# Altium PCB PCB1.PcbDoc
Units mil, origin at the board's own origin, x right, y up, seen from the top; angles counter-clockwise.
Board outline 2550 x 2235 mil, 2 copper layers (Top Layer, Bottom Layer); 39 components, 28 nets, 166 pads, 16 vias.
Unrouted connection lines stored in the file: 1.
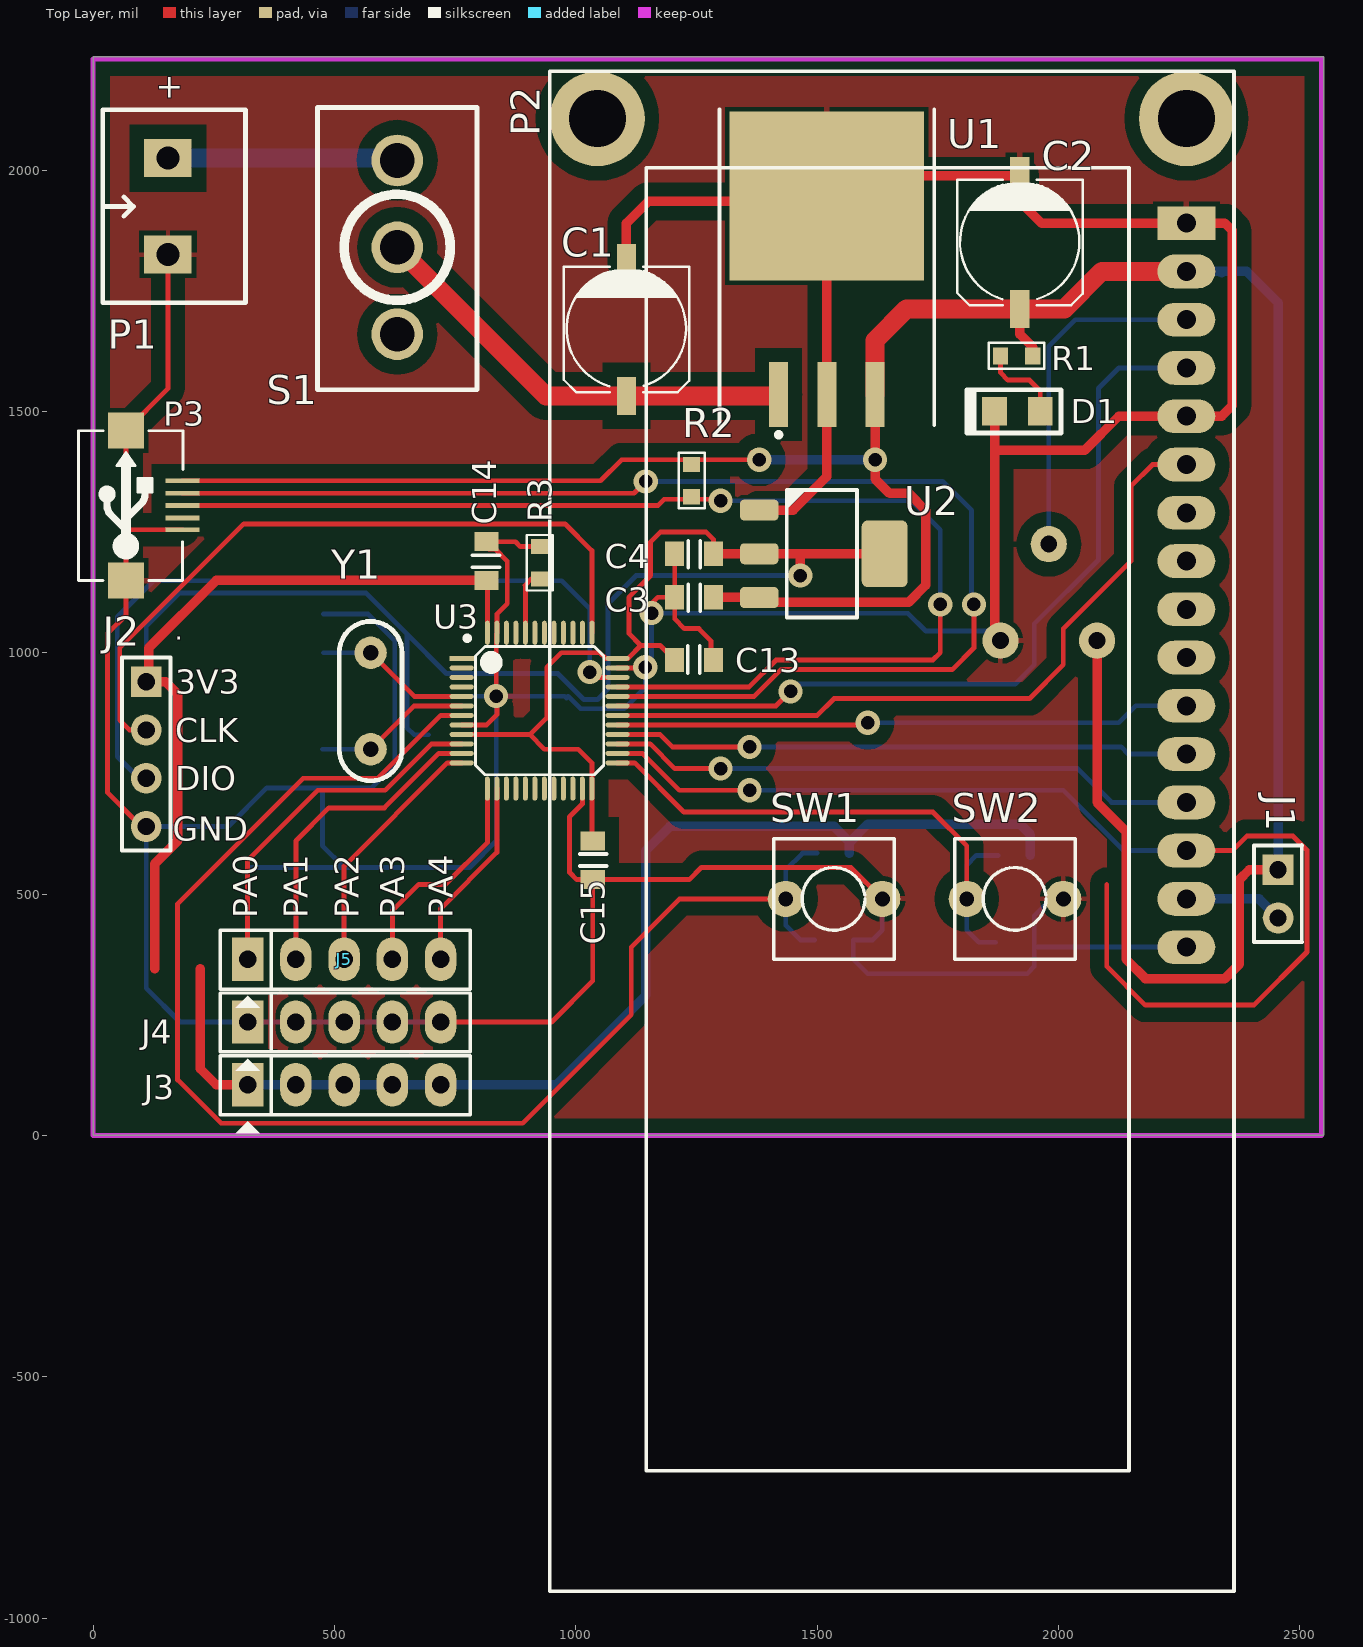
[diagram p0: Top Layer view]
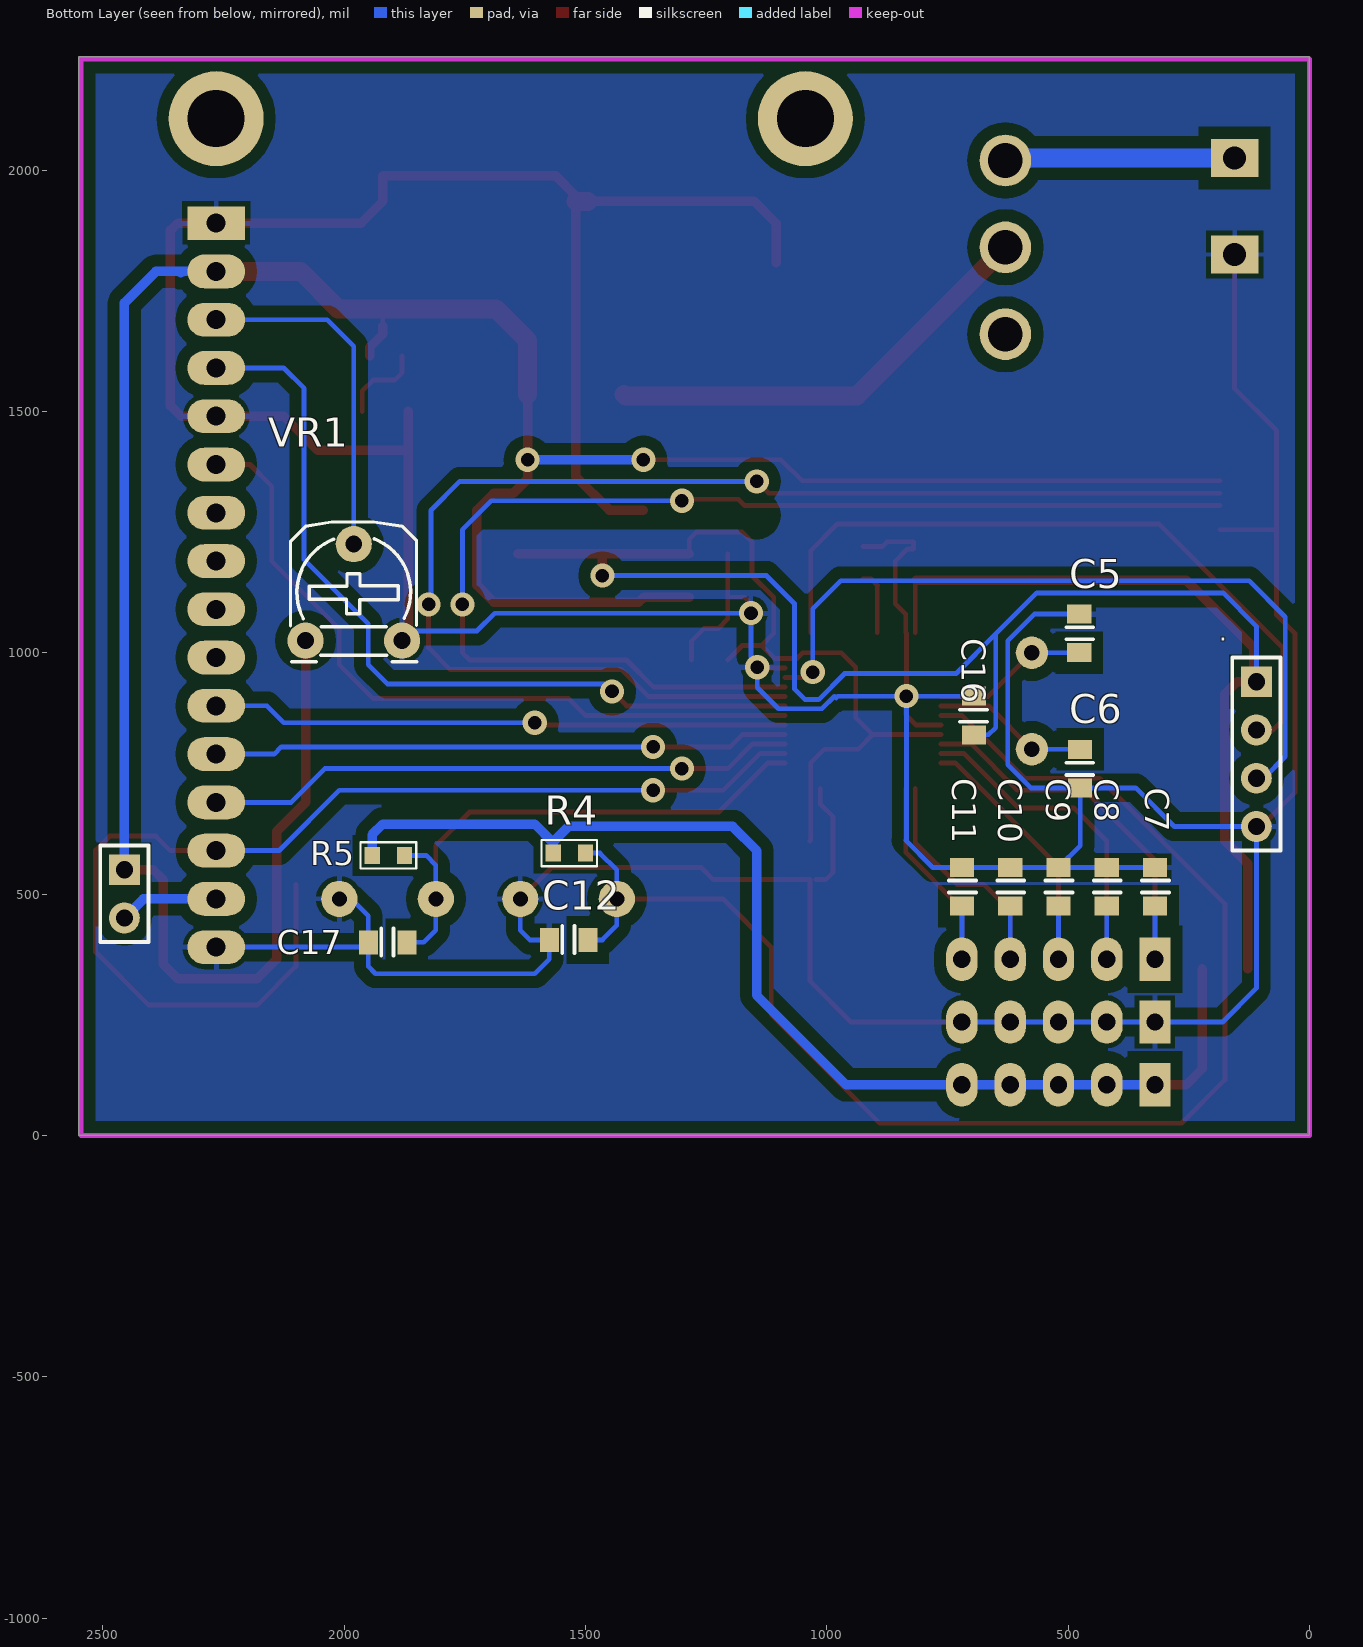
[diagram p1: Bottom Layer view, seen from below]
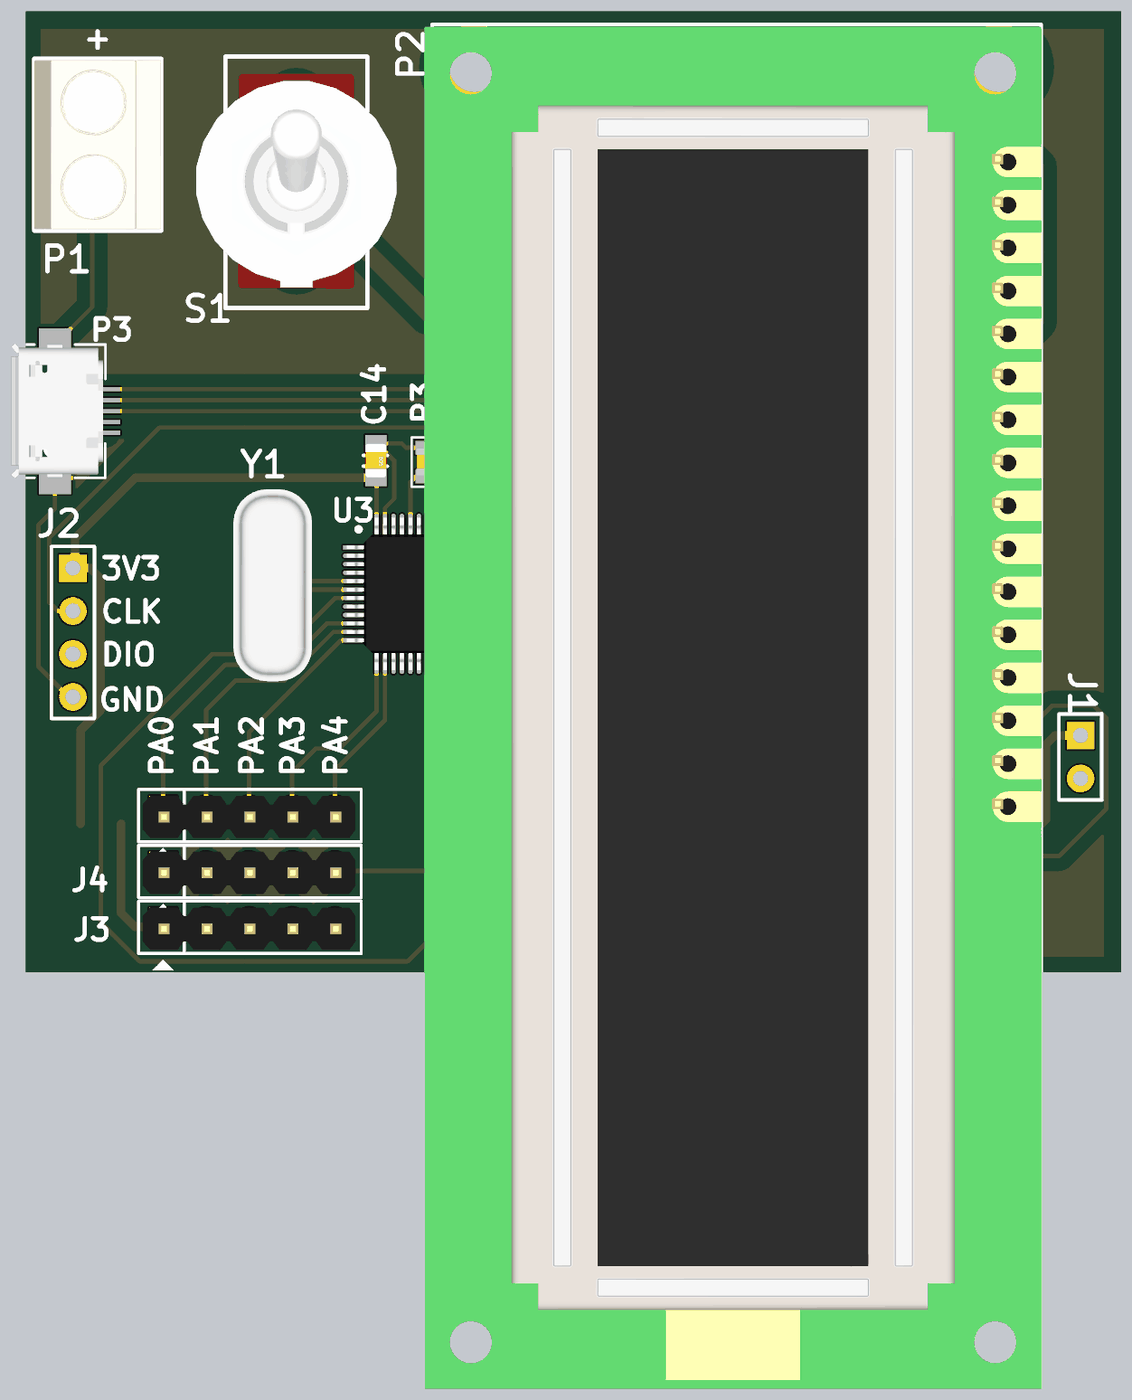
[diagram p2: 3D render of the assembled board from above, using the file's embedded part models]
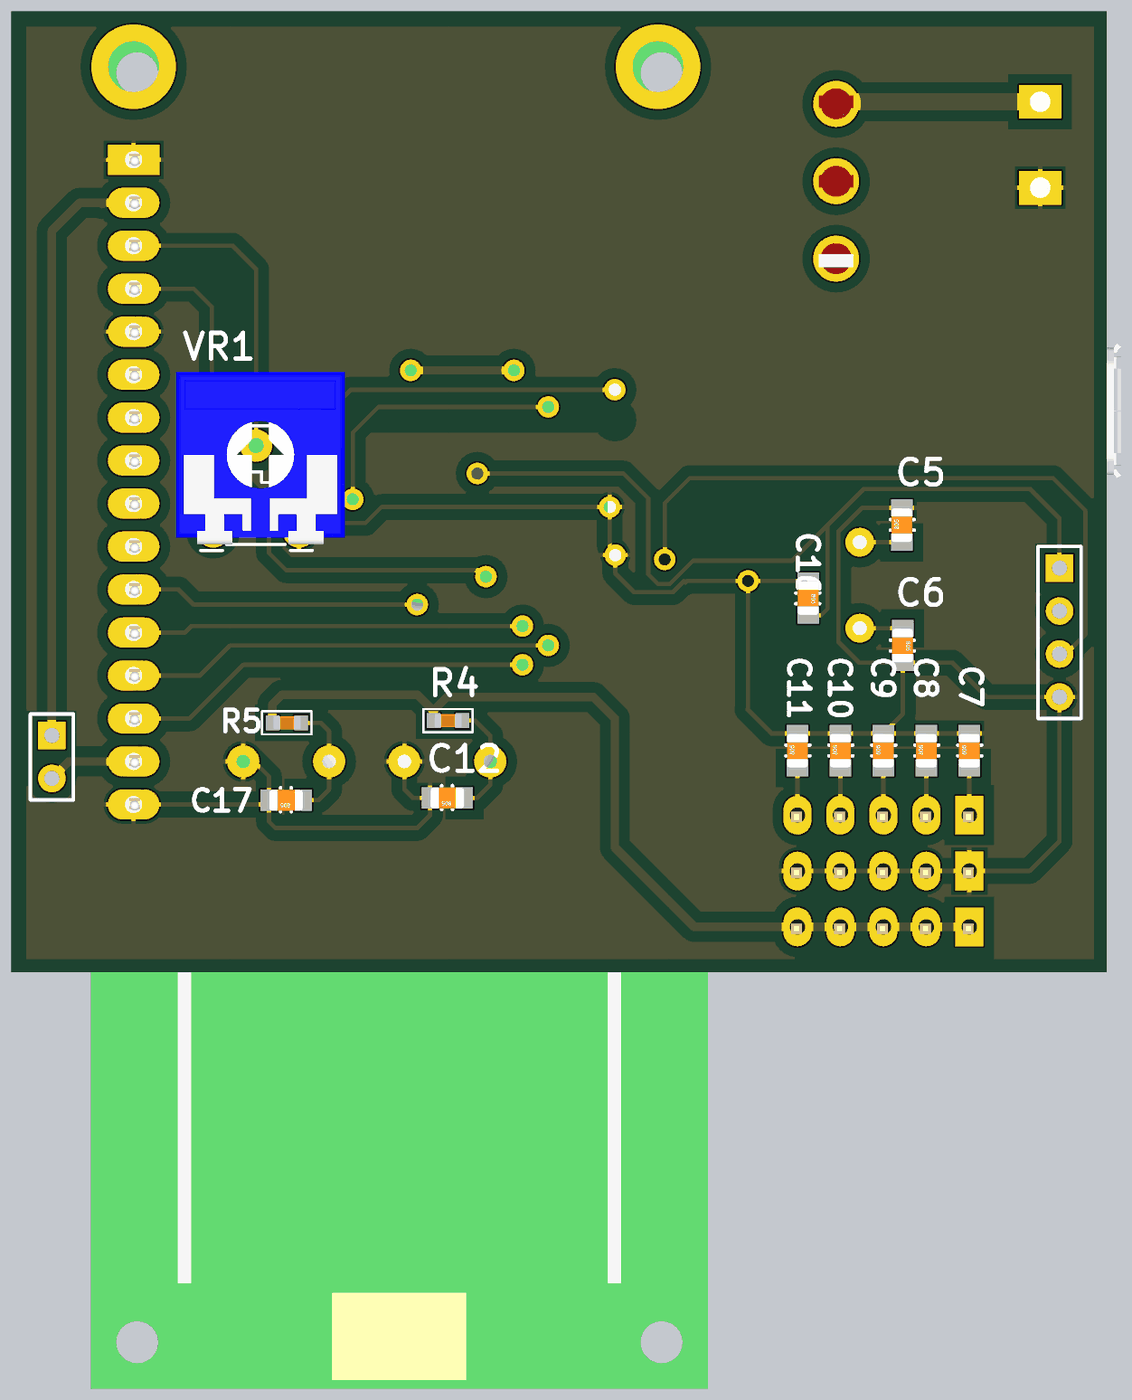
[diagram p3: 3D render of the assembled board from below, using the file's embedded part models]

## Layer stack, top to bottom
Top Solder: solder mask 0.4, Solder Resist, Dk 3.5
Top Layer: signal copper 1.4
Dielectric 1: dielectric 12.6, FR-4, Dk 4.8
Bottom Layer: signal copper 1.4
Bottom Solder: solder mask 0.4, Solder Resist, Dk 3.5

## Board outline
0,0 2550,0 2550,2235 0,2235

## Design rules (kind name [scope] priority, off if disabled: settings)
Clearance [All] p1: gap=2 ignorepadtopadclearanceinfootprint=FALSE
PolygonConnect [All] p1: connectstyle=Relief reliefconductorwidth=10 reliefentries=4 polygonreliefangle="90 Angle" airgapwidth=10
RoutingVias [All] p1: holewidth=28 width=50 viastyle="Through Hole" minholewidth=28 minwidth=50 maxholewidth=28 maxwidth=50
SolderMaskExpansion [All] p1: expansion=4
Width [All] p1: maxlimit=39.37 minlimit=10 preferedwidth=19.68
30 further rules are at their usual default settings.

## Components (designator, comment, footprint, x,y, rotation, side; value= is the part's Value field where it differs from the comment)
C1 "100uF" CAP_SMD_6_3MM 1105,1670 r90 top
C2 "100uF" CAP_SMD_6_3MM 1920,1850 r90 top
C3 "Cap Non-pol" CAP_SMD_0805 1245,1115 r0 top value=104
C4 "Cap Non-pol" CAP_SMD_0805 1245,1205 r0 top value=104
C5 "Cap Non-pol" CAP_SMD_0805 477,1040 r90 bottom value=22pF
C6 "Cap Non-pol" CAP_SMD_0805 475,760 r270 bottom value=22pF
C7 "Cap Non-pol" CAP_SMD_0805 320,515 r90 bottom value=104
C8 "Cap Non-pol" CAP_SMD_0805 420,515 r90 bottom value=104
C9 "Cap Non-pol" CAP_SMD_0805 520,515 r90 bottom value=104
C10 "Cap Non-pol" CAP_SMD_0805 620,515 r90 bottom value=104
C11 "Cap Non-pol" CAP_SMD_0805 720,515 r90 bottom value=104
C12 "Cap Non-pol" CAP_SMD_0805 1535,405 r0 bottom value=104
C13 "Cap Non-pol" CAP_SMD_0805 1245,985 r180 top value=104
C14 "Cap Non-pol" CAP_SMD_0805 815,1190 r270 top value=104
C15 "Cap Non-pol" CAP_SMD_0805 1035,570 r90 top value=104
C16 "Cap Non-pol" CAP_SMD_0805 695,870 r270 bottom value=104
C17 "Cap Non-pol" CAP_SMD_0805 1910,400 r0 bottom value=104
D1 "LED" "LED-0805 GREEN" 1915,1500 r180 top
J1 "Jumper LCD A" CON.HDR1X2 2455,550 r270 top value=J3
J2 "Serial Wire" CON.HDR1X4 110,940 r270 top
J3 "JP5" JP5 320,105 r0 top
J4 "JP5" JP5 320,235 r0 top
J5 "JP5" JP5 320,365 r0 top
P1 "Pin" "Medium - Header 2" 155,1925 r90 top
P2 "LCD16x2" LCD16x2 2261,1891 r270 top
P3 "Micro USB" USB-MICRO 185,1305 r90 top
R1 "RESISTOR" RES_SMD_0603 1920,1615 r0 top value=1K
R2 "RESISTOR" RES_SMD_0603 1240,1350 r270 top value=1K5
R3 "RESISTOR" RES_SMD_0603 925,1180 r270 top value=10K
R4 "RESISTOR" RES_SMD_0603 1540,585 r0 bottom value=10K
R5 "RESISTOR" RES_SMD_0603 1915,580 r0 bottom value=10K
S1 "Switch SPDT" SPDT 630,2020 r270 top
SW1 "SW" SW2 1435,490 r0 top value="SW chip 2 pin"
SW2 "SW" SW2 1810,490 r0 top value="SW chip 2 pin"
U1 "LM78xx" TO-263 1420.22,1534.66 r0 top value=LM7805CT
U2 "AMS1117-3.3" SOT223 1511,1205 r270 top
U3 "STM32F103C8T6" TQFP48L 925,880 r0 top
VR1 "100K" VR 2080,1025 r180 bottom value="VR 10K"
Y1 "8MHz" XTAL 575,900 r180 top

## Footprints (in the part's own frame and the unit in brackets; to place one, negate y for a bottom-side part, rotate by r counter-clockwise, add the part's x,y. Pads: shape width x height; smd on the part's side, far side on the other; paste and mask are expansions set on the pad)
CAP_SMD_6_3MM [mm] "47uF 25V"
  rect 2x1.016 smd: 1(-3.5,0) 2(3.5,0)
  silkscreen extent -3.3,-3.3 3.3,3.3, body extent -3.79,-3.25 3.75,3.25, height 5.52
CAP_SMD_0805 [mil] "Chip Resistor; Body 2.0 x 1.3 mm (LxW typ)"
  rect 39.37x50 smd: 1(-40,0) 2(40,0)
  silkscreen extent -12,-29 13,27, body extent -39,-25 39,25, height 31
CON.HDR1X2 [mil]
  rect 64x64 hole 35.43: 1(-0.44,0.28)
  round 64 hole 35.43: 2(99.56,0.28)
  silkscreen extent -51,-50 150,50, body extent -51,-50 149,50, height 350
CON.HDR1X4 [mil]
  rect 64x64 hole 35.43: 1(0,0)
  round 64 hole 35.43: 2(100,0) 3(200,0) 4(300,0)
  silkscreen extent -50,-50 350,50, body extent -50,-50 350,50, height 350
JP5 [mil] "JP5"
  rect 65x90 hole 36: 1(0,0)
  oval 65x90 hole 36: 2(100,0) 3(200,0) 4(300,0) 5(400,0)
  silkscreen extent -57,-101 461,60, body extent -48,-53 448,45, height 323
LCD16x2 [mil] "Character LCD 16x2"
  round 196.85 hole 118.11: 0(-215.54,4) 0(-215.54,-1216.47)
  round 0 all layers, no hole: 0(2737.22,-1216.47) 0(2737.22,4) ""(-215.54,4)
  rect 70x120 hole 39.37: 1(1,4)
  oval 70x120 hole 39.37: 2(101,4.02) 3(201,4) 4(301,4) 5(401,4) 6(501,4) 7(601,4) 8(701,4) 9(801,4) 10(901,4) 11(1001,4) 12(1101,4) 13(1201,4) 14(1301,4) 15(1401,4) 16(1501,4)
  silkscreen extent -314,-1315 2836,102, body extent -309,-1333 2861,104, height 788
"LED-0805 GREEN" [mm] "Chip LED; GREEN; Body 2.0 x 1.3 mm (LxW typ) [2012]"
  rect 1.3x1.5 smd: 1(-1.204,0) 2(1.204,0)
  silkscreen extent -2.29,-1.14 2.67,1.14, body extent -1.01,-0.63 1.01,0.62, height 1.1
"Medium - Header 2" [mm]
  rect 2x2.5 hole 1.2: 1(-2.54,0) 2(2.54,0)
  silkscreen extent -5.08,-4.08 5.08,3.43, body extent -5,-4.07 5,3.43, height 10
RES_SMD_0603 [mm] "Chip Resistor; Body 2.0 x 1.3 mm (LxW typ)"
  rect 0.8x0.9 smd: 1(-1.016,0) 2(0.684,0)
  silkscreen extent -1.63,-0.69 1.3,0.69, body extent -0.98,-0.39 0.62,0.41, height 0.5
SOT223 [mm]
  round 1 on Mech15: 0(0,-0.025)
  rrect40% 1.1x2.032 smd: 1(-2.3,-3.325) 2(0,-3.325) 3(2.3,-3.325)
  rrect25% 3.5x2.413 smd: 2(0,3.275)
  silkscreen extent -3.35,-1.88 3.35,1.82, body extent -3.25,-3.53 3.25,3.47, height 1.7
SPDT [mil] "Single-Pole, Double-Throw Switch; Solder Pad 35mil"
  round 107 hole 72: 1(0,0) 2(180,0) 3(360,0)
  silkscreen extent -110,-165 475,165, body extent -70,-233 430,233, height 1127
SW2 [mil] "SW button 2pin, 250x 250 mil"
  round 75 hole 31: 1(0,0) 2(200,0)
  silkscreen extent -25,-125 225,125
TO-263 [mm]
  rect 1x3.4 smd: 1(-0.006,0.009) 2(2.534,0.009) 3(5.074,0.009)
  rect 10.25x8.9 smd: 2(2.534,10.459)
  silkscreen extent -3.11,-2.23 8.19,15.01, body extent -2.46,-1.15 7.54,14.21, height 4.5
TQFP48L [mm] "TQFP, 48-Leads, Body 7.00x7.00mm, Pitch 0.50mm, IPC High Density"
  rect 1.27x0.254 smd: 1(-4.1,2.75)
  oval 1.27x0.254 smd: 2(-4.1,2.25) 3(-4.1,1.75) 4(-4.1,1.25) 5(-4.1,0.75) 6(-4.1,0.25) 7(-4.1,-0.25) 8(-4.1,-0.75) 9(-4.1,-1.25) 10(-4.1,-1.75) 11(-4.1,-2.25) 12(-4.1,-2.75) 25(4.1,-2.75) 26(4.1,-2.25) 27(4.1,-1.75) 28(4.1,-1.25) 29(4.1,-0.75) 30(4.1,-0.25) 31(4.1,0.25) 32(4.1,0.75) 33(4.1,1.25) 34(4.1,1.75) 35(4.1,2.25) 36(4.1,2.75)
  oval 0.254x1.27 smd: 13(-2.75,-4.1) 14(-2.25,-4.1) 15(-1.75,-4.1) 16(-1.25,-4.1) 17(-0.75,-4.1) 18(-0.25,-4.1) 19(0.25,-4.1) 20(0.75,-4.1) 21(1.25,-4.1) 22(1.75,-4.1) 23(2.25,-4.1) 24(2.75,-4.1) 37(2.75,4.1) 38(2.25,4.1) 39(1.75,4.1) 40(1.25,4.1) 41(0.75,4.1) 42(0.25,4.1) 43(-0.25,4.1) 44(-0.75,4.1) 45(-1.25,4.1) 46(-1.75,4.1) 47(-2.25,4.1) 48(-2.75,4.1)
  silkscreen extent -3.93,-3.37 3.37,3.93, body extent -4.5,-4.5 4.5,4.5, height 1.45
USB-MICRO [mil]
  rect 10x70 smd: 1(51.18,0) 2(25.59,0) 3(0,0) 4(-25.59,0) 5(-50,0)
  rect 74.8x74.8 smd: 5(-155.51,116.84) 5(155.51,116.84)
  silkscreen extent -155,-1 155,215, body extent -157,5 158,218, height 107
VR [mil] "Resistor Variable"
  round 75 hole 35: 1(0,0) 2(100,200) 3(200,0)
  silkscreen extent -31,-44 231,246, body extent -87,-30 307,372, height 165
XTAL [mil] "Crystal, Thru-Hole; 2 Leads; Body 3.1 x 8.2 mm (Dia.xH); Solder pad 35mil"
  round 67 hole 32: 1(0,100) 2(0,-100)
  silkscreen extent -65,-165 65,165, body extent -92,-223 92,223, height 139

## Part data
C1 C2: library part Cap_Pol, "Polarized Capacitor", Capacitor Type=Tant, Manufacturer=FARNELL, Volt=25V, AEMS Code=2100110, ComponentLink1Description="Digikey Part Link", ComponentLink2Description="Open Datasheet", ComponentLink2URL=H:\LIBRARY\LIBRARY.Datasheet\, Published=13-April-2009, Publisher="Hoang Nguyen", Vendor=Digikey
C3 C4 C5 C6 C7 C8 C9 C10 C11 C12 C13 C14 C15 C16 C17: "Non-polarized Capacitor", LatestRevisionNote="Re-released for DXP Platform.", PackageReference=RAD-0.3, Publisher="Altium Limited"
D1: "Typical LED", LatestRevisionDate=08-Jul-2005, LatestRevisionNote="Mech Layer 1 removed.", PackageReference=LED-1, Published=8-Jun-2000, Publisher="Altium Limited"
J1: library part JP2, "Jumper 3"
J2: library part JP4
P1: library part "Header 2 - M", "Header, 2-Pin, Medium", LatestRevisionDate=17-Jul-2002, LatestRevisionNote="Re-released for DXP Platform.", Publisher="Altium Limited"
P2: library part "LCD Text"
P3: library part USB_M
R1 R2 R3 R4 R5: "Resistor", LatestRevisionDate=17-Jul-2002, LatestRevisionNote="Re-released for DXP Platform.", PackageReference=AXIAL-0.3, Published=8-Jun-2000, Publisher="Altium Limited"
S1: "Single-Pole, Double-Throw Switch", ComponentLink1Description="Manufacturer Link", ComponentLink1URL=http://www.apem.com, DatasheetDocument=05-Dec-2000, LatestRevisionDate=17-Dec-2003, LatestRevisionNote="Schematic revised, PCB Footprint replaced.", PackageReference=TL36WW15050, Published=24-Mar-1999, Publisher="Altium Limited"
SW1 SW2: library part SW2, "Switch button 2 pin"
U1: library part 78xx, "Regulator", Manufacturer="Fairchild Semiconductor Corporation", Output Current="Up to 1A", PSpiceTemplate="X^@REFDES %IN %OUT %GND @MODEL", Tolerance="4 %", ComponentLink1Description="Digikey Part Link", ComponentLink2Description="Open Datasheet", ComponentLink2URL=H:\LIBRARY\LIBRARY.Datasheet\LM7805.pdf, Price="2500 VND", Published=13-April-2009, Publisher="Hoang Nguyen", Vendor=Digikey, V out=5V
U2: library part AMS1117, "Regulator SMD Chip", ComponentLink1Description="Digikey Part Link", ComponentLink2Description="Open Datasheet", ComponentLink2URL=H:\LIBRARY\LIBRARY.Datasheet\, Designed By="John MacTavish", Vendor=Digikey
U3: library part STM32F103C8T6-LQFP48, ComponentLink1Description="Manufacturer Link", ComponentLink1URL=www.st.com/stm32, ComponentLink2Description=Datasheet, ComponentLink2URL=http://www.st.com/stonline/products/literature/ds/13586.pdf, DatasheetVersion="rev6, Mar-2008", PackageDescription="48-Pin Low-Profile Quad Flat Pack, 7 x 7 mm Body, 0.5 mm Pitch (LQFP48)", PackageReference=LQFP48, PackageVersion=Mar-2008, Published=30-May-2008, Publisher="Altium Limited"
VR1: library part VR1, "Var Resistor"
Y1: library part XTAL, "Crystal Oscillator", LatestRevisionDate=17-Jul-2002, LatestRevisionNote="Re-released for DXP Platform.", PackageReference=R38, Published=8-Jun-2000, Publisher="Altium Limited"

## Via types
v1: diameter 50, hole 28, Top Layer to Bottom Layer, 16 vias

## Nets (pads, with @x,y where several pads share a name; then routed paths per layer and width w, separated by ;. In a path a pad name is that pad's centre, name@x,y a point inside that pad or via, vN(x,y) a via of type N, cw(c..) or ccw(c..) an arc to the next point about the centre after c; other vN are vias at no path point)
3V3: C4.2 C13.2 C14.2 C15.2 C16.2 J2.1 J3.1 J3.2 J3.3 J3.4 J3.5 R4.2 R5.2 U2.2 U3.9 U3.24 U3.36 U3.48 | length 7825.5
  Top Layer w10: U3.9 904.21,830.79 ; C14.2 816.73,1148.27 U3.48 ; C15.2 1033.27,611.73 U3.24 1033.27,771.73 1005,800 935,800 904.21,830.79 ; C13.2 1175,1015 1135,1015 ; C4.2 1285,1235 1270,1250 1175,1250 1155,1230 1155,1160 1110,1115 1110,1040 1135,1015 ; 904.21,830.79 905.79,830.79 940,865 940,970 970,1000 1050,1000 1061.73,988.27 U3.36 1108.27,988.27 1135,1015
  Top Layer w19.68: J2.1 J2.1@115,940 ; 128,345 128,563 175,610 175,915 150,940 J2.1@115,940 ; 222,345 222,138 255,105 J3.1 ; C14.2 255,1150 115,1010 J2.1@115,940 ; C4.2 1380.08,1205 1465,1205 ; v1(1465,1160) 1465,1205 ; U2.2@1639.92,1205 1465,1205
  Bottom Layer w10: J2.1 110,1055 179,1124 565,1124 650,1039 ; C16.2 665,830 650,845 650,1039 ; v1(1465,1160) 1125,1160 1067,1102 1067,925 1045,903 1017,903 963,957 732,957 650,1039
  Bottom Layer w19.68: J3.1 J3.2 J3.3 J3.4 J3.5 960,105 1145,290 1145,590 1195,640 1535,640 1566.93,608.07 1566.93,606.93 ; R4.2 1566.93,606.93 ; R5.2 1941.93,623.07 1920,645 1605,645 1566.93,606.93
5V: C2.1 C3.2 J1.1 P2.2 P3.1 R1.2 R2.1 U1.3 U2.3 VR1.1 | length 5976.4
  Top Layer w10: P3.1 1051.18,1356.18 1095,1400 v1(1380,1400) v1@1365,1415 ; 1332,1115 1332.55,1114.45 U2.3 ; C2.1@1920,1676.93 C2.1
  Top Layer w19.68: C3.2 1332,1115 1379.53,1115 U2.3 1389.53,1105 1690,1105 1725,1140 1725,1295 1690,1330 1650,1330 1620,1360 v1(1620,1400) U1.3 ; C2.1@1920,1676.93 1920,1660 1946.93,1633.07 R1.2 ; VR1.1 2080,690 2140,630 2140,365 2180,325 2345,325 2375,355 2375,530 2395.44,550.44 J1.1
  Top Layer w39.37: U1.3 1620,1647.2 1685,1712.2 C2.1 2012.2,1712.2 2090,1790 P2.2
  Bottom Layer w19.68: v1(1380,1400) v1(1620,1400) ; P2.2 2335,1790 ; 2338,1787 2335,1790 ; J1.1 2455.28,1724.72 2390,1790 2335,1790
BOOT0: R3.2 U3.44 | length 134.2
  Top Layer w10: U3.44 895.47,1139.53 895,1140 908.07,1153.07 R3.2
GND: C1.2 C2.2 C3.1 C4.1 C5.2 C6.2 C7.2 C8.2 C9.2 C10.2 C11.2 C12.2 C13.1 C14.1 C15.1 C16.1 C17.2 D1.2 J2.4 J4.1 J4.2 J4.3 J4.4 J4.5 P1.1 P2.1 P2.5 P2.16 P3.5 R3.1 SW1.2 SW2.2 U1.2 U2.1 U3.8 U3.23 U3.35 U3.47 VR1.3 | length 12739.4
  Top Layer w10: J2.4 100,640 30,710 30,1040 68.16,1078.16 68.16,1149.49 68.16,1255 ; P1.1 155,1547.35 68.16,1460.51 68.16,1255 ; P3.5@185,1255 68.16,1255 ; J4.5 950,235 1035,320 C15.1 1235,530 1260,555 1570,555 SW1.2 ; U3.8 815.47,850.47 836.42,871.42 836.42,884.89 ; v1(835,910) 835,1040 U3.47 836.42,1080 858,1101.58 858,1190 833,1215 820,1215 820,1230 875,1230 885,1220 R3.1 ; U3.23 1013.58,686.58 987,660 987,545 1002,530 C15.1@1022,530 ; U3.35 1142.58,968.58 v1(1144,970) ; C1.2@1105,1807 C1.2 ; v1(1157,1082) 1157,1102 1170,1115 C3.1 ; C4.1 C3.1 ; C13.1@1280,985 1280,1025 1255,1050 1225,1050 1205,1070 C3.1
  Top Layer w19.68: C1.2 1105,1890 1150,1935 U1.2@1495,1935 ; U2.1 1450.55,1295.55 1520,1365 1520,1535 U1.2@1520,1935 ; U1.2@1520,1946.42 1561.38,1987.8 C2.2 1920,1935 1965,1890 P2.1 2345,1890 2360,1875 2360,1512 2338,1490 P2.5 2125,1490 2055,1420 1867.6,1420 ; D1.2 1867.6,1420 ; VR1.3 1867.6,1037.4 1867.6,1420
  Top Layer w39.37: U1.2@1495,1935 U1.2@1520,1935
  Bottom Layer w10: C7.2 C8.2 C9.2 ; C5.2 570,1080 625,1025 625,768 577,720 C6.2 ; C16.1 v1(835,910) ; J4.5 J4.4 J4.3 J4.2 J4.1 180,235 110,305 J2.4 280,640 360,720 C6.2 ; SW1.2 1635,425 1615,405 C12.2 1575,365 1605,335 1935,335 1950,350 C17.2@1950,390 ; VR1.3@1850,1045 1725,1045 1688,1082 v1(1157,1082) 1157,992 1144,979 v1(1144,970) 1144,928 1100,884 1010,884 984,910 980.42,906.42 976.84,910 v1(835,910) ; SW2.2 1985,490 1950,455 C17.2 C17.2@1950,390 ; P2.16 C17.2@1950,390 ; C6.2 475,600 C9.2 ; C9.2 C10.2 C11.2 780,555 836.42,611.42 835,612.84 v1(835,910)
LCD_A: J1.2 P2.15 | length 206.7
  Bottom Layer w19.68: P2.15 2415.72,490 J1.2
LCD_D4: P2.11 U3.29 | length 1195
  Top Layer w10: U3.29 1600.47,850.47 v1(1605,855)
  Bottom Layer w10: v1(1605,855) 2125,855 2160,890 P2.11
LCD_D5: P2.12 U3.28 | length 1195.5
  Top Layer w10: U3.28 1142.56,830.79 1142.65,830.87 1174.13,830.87 1200,805 v1(1360,805)
  Bottom Layer w10: v1(1360,805) 2130,805 2145,790 P2.12
LCD_D6: P2.13 U3.27 | length 1228.7
  Top Layer w10: U3.27 1153.9,811.1 1205,760 v1(1300,760)
  Bottom Layer w10: v1(1300,760) 2040,760 2110,690 P2.13
LCD_D7: P2.14 U3.26 | length 2411.2
  Top Layer w10: U3.26 1137.9,791.42 1214.32,715 v1(1360,715) ; 2100,520 2100,350 2180,270 2405,270 2515,380 2515,591 2486,620 2390,620 2360,590 P2.14
  Bottom Layer w10: v1(1360,715) 2010,715 2135,590 P2.14
LCD_EN: P2.6 U3.30 | length 1528.6
  Top Layer w10: U3.30 1500.16,870.16 1535,905 1940,905 2010,975 2010,1050 2150,1190 2150,1345 2195,1390 P2.6
LCD_RS: P2.4 U3.31 | length 1726.3
  Top Layer w10: U3.31 1414.84,889.84 v1(1445,920)
  Bottom Layer w10: v1(1445,920) 1460,935 1910,935 1950,975 1950,1060 2083,1193 2083,1548 2125,1590 P2.4
LCD_V0: P2.3 VR1.2 | length 717.8
  Bottom Layer w10: VR1.2 1980,1635 2035,1690 P2.3
NetC1_1: C1.1 S1.2 U1.1 | length 918.7
  Top Layer w39.37: S1.2 937.8,1532.2 C1.1 1417.2,1532.2 U1.1
NetD1_1: D1.1 R1.1 | length 175.5
  Top Layer w10: R1.1 1880,1580 1895,1565 1940,1565 1962.4,1542.6 D1.1
NetP1_2: P1.2 S1.1 | length 477.1
  Bottom Layer w39.37: P1.2 625,2025 S1.1
NEXT: C17.1 R5.1 SW2.1 U3.25 | length 1183.4
  Top Layer w10: U3.25 1121.84,771.73 1223.57,670 1740,670 1810,600 SW2.1
  Bottom Layer w10: C17.1 1835,400 1810,425 SW2.1 1810,560 1830,580 R5.1
PA0: C7.1 J5.1 U3.10 | length 858.4
  Top Layer w10: J5.1 320,570 465,715 605,715 701.1,811.1 U3.10
  Bottom Layer w10: J5.1 C7.1
PA1: C8.1 J5.2 U3.11 | length 773.7
  Top Layer w10: J5.2 420,610 488.45,678.45 603.45,678.45 716.42,791.42 U3.11
  Bottom Layer w10: J5.2 C8.1
PA2: C9.1 J5.3 U3.12 | length 635
  Top Layer w10: J5.3 520,557.83 733.9,771.73 U3.12
  Bottom Layer w10: J5.3 C9.1
PA3: C10.1 J5.4 U3.13 | length 577.3
  Top Layer w10: J5.4 620,465 675,520 730,520 816.73,606.73 U3.13
  Bottom Layer w10: J5.4 C10.1
PA4: C11.1 J5.5 U3.14 | length 511.8
  Top Layer w10: J5.5 720,470 836.42,586.42 U3.14
  Bottom Layer w10: J5.5 C11.1
RST: C12.1 R4.1 SW1.1 U3.7 | length 2954
  Top Layer w10: U3.7 720.16,870.16 590,740 435,740 175,480 175,115 265,25 890,25 1115,250 1115,390 1215,490 SW1.1
  Bottom Layer w10: C12.1 1465,405 1435,435 SW1.1 1435,550 1470,585 R4.1
SWCLK: J2.2 U3.37 | length 1491.1
  Top Layer w10: J2.2 75,840 55,860 55,1010 312,1267 342.13,1267 978.25,1266.75 1033.27,1211.73 U3.37
SWDIO: J2.3 U3.34 | length 1594.7
  Top Layer w10: v1(1029,960) 1040.1,948.9 U3.34
  Bottom Layer w10: J2.3 95,740 50,785 50,1074 125,1149 971,1149 1029,1091 v1(1029,960)
USB_DM: P3.2 U3.32 | length 2735.2
  Top Layer w10: P3.2 1120.59,1330.59 v1(1145,1355) ; U3.32 1369.53,909.53 1425,965 1780,965 1825,1010 v1(1825,1100)
  Bottom Layer w10: v1(1145,1355) 1760,1355 1820,1295 v1@1820,1100
USB_DP: P3.3 R2.2 U3.33 | length 2554.4
  Top Layer w10: P3.3 1170,1305 1183.07,1318.07 1296.93,1318.07 v1(1300,1315) ; U3.33 1359.21,929.21 1415,985 1740,985 1755,1000 v1(1755,1100)
  Bottom Layer w10: v1(1300,1315) 1695,1315 1755,1255 v1(1755,1100)
XTAL1: C5.1 U3.5 Y1.2 | length 324.1
  Top Layer w10: Y1.2 665.47,909.53 U3.5
  Bottom Layer w10: C5.1 Y1.2
XTAL2: C6.1 U3.6 Y1.1 | length 325.8
  Top Layer w10: Y1.1 664.84,889.84 U3.6
  Bottom Layer w10: C6.1 Y1.1
pads on no net: P2. P2.0 P2.7 P2.8 P2.9 P2.10 P3.4 S1.3 U2.0 U3.1 U3.2 U3.3 U3.4 U3.15 U3.16 U3.17 U3.18 U3.19 U3.20 U3.21 U3.22 U3.38 U3.39 U3.40 U3.41 U3.42 U3.43 U3.45 U3.46

## Polygon pours and split planes (outlines as drawn)
GND on Bottom Layer "Bottom Layer-No Net" (solid, remove dead copper, pour order 2): -5,2240 2550,2240 2550,0 10,0 5,-5
GND on Top Layer "Bottom Layer-No Net" (solid, remove dead copper, pour order 8): -5,2240 2550,2240 2545,2235 2545,-10 0,-10 -5,-5

## Keep-outs
Keep-Out Layer:
  lines w10: 0,0 2545,0 2545,2230 0,2230 0,0

## Silkscreen, mask and mechanical layers (free items; w line width, h text height)
Top Overlay:
  text "+" at 130,2150 h50
  text "3V3" at 170,915 h50
  text "CLK" at 170,815 h50
  text "DIO" at 170,715 h50
  text "GND" at 165,610 h50
  text "PA0" at 340,450 h50 r90
  text "PA1" at 445,450 h50 r90
  text "PA2" at 550,450 h50 r90
  text "PA3" at 645,450 h50 r90
  text "PA4" at 745,450 h50 r90